# Altium PCB FOC_DRV8323.PcbDoc
Units mil, origin at the board's own origin, x right, y up, seen from the top; angles counter-clockwise.
Board outline 1427.17 x 915.35 mil, 4 copper layers (Top Layer, GND, Sign, Bottom Layer), stack 23.756 mil thick; 70 components, 66 nets, 289 pads, 121 vias.
Unrouted connection lines stored in the file: 51.
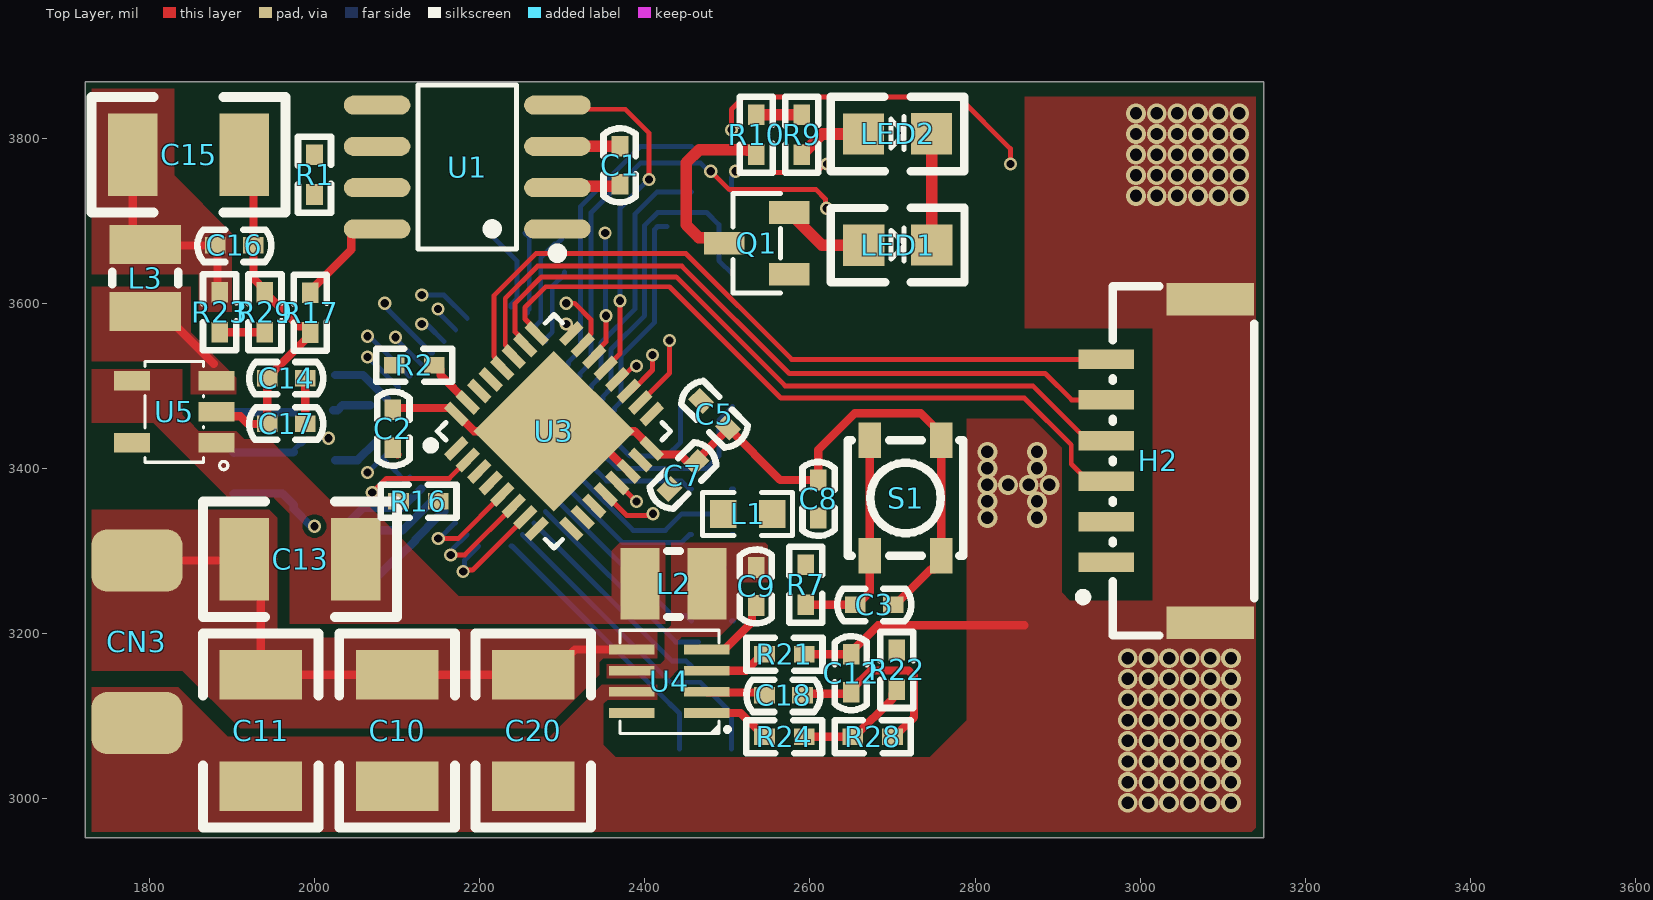
[diagram p0: Top Layer view]
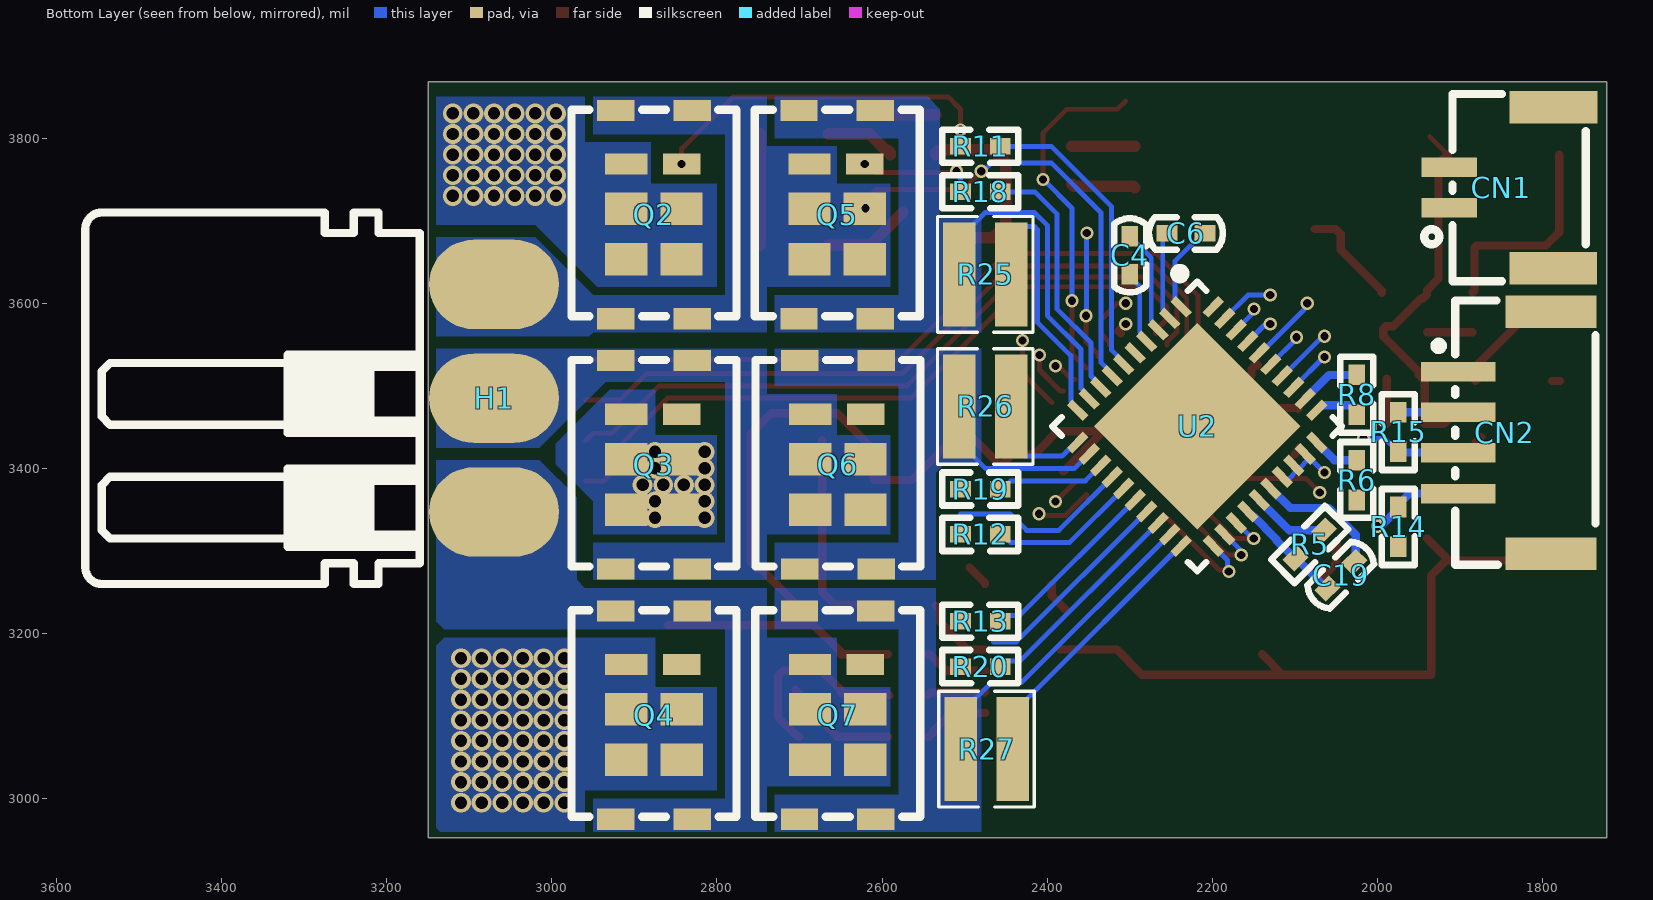
[diagram p1: Bottom Layer view, seen from below]
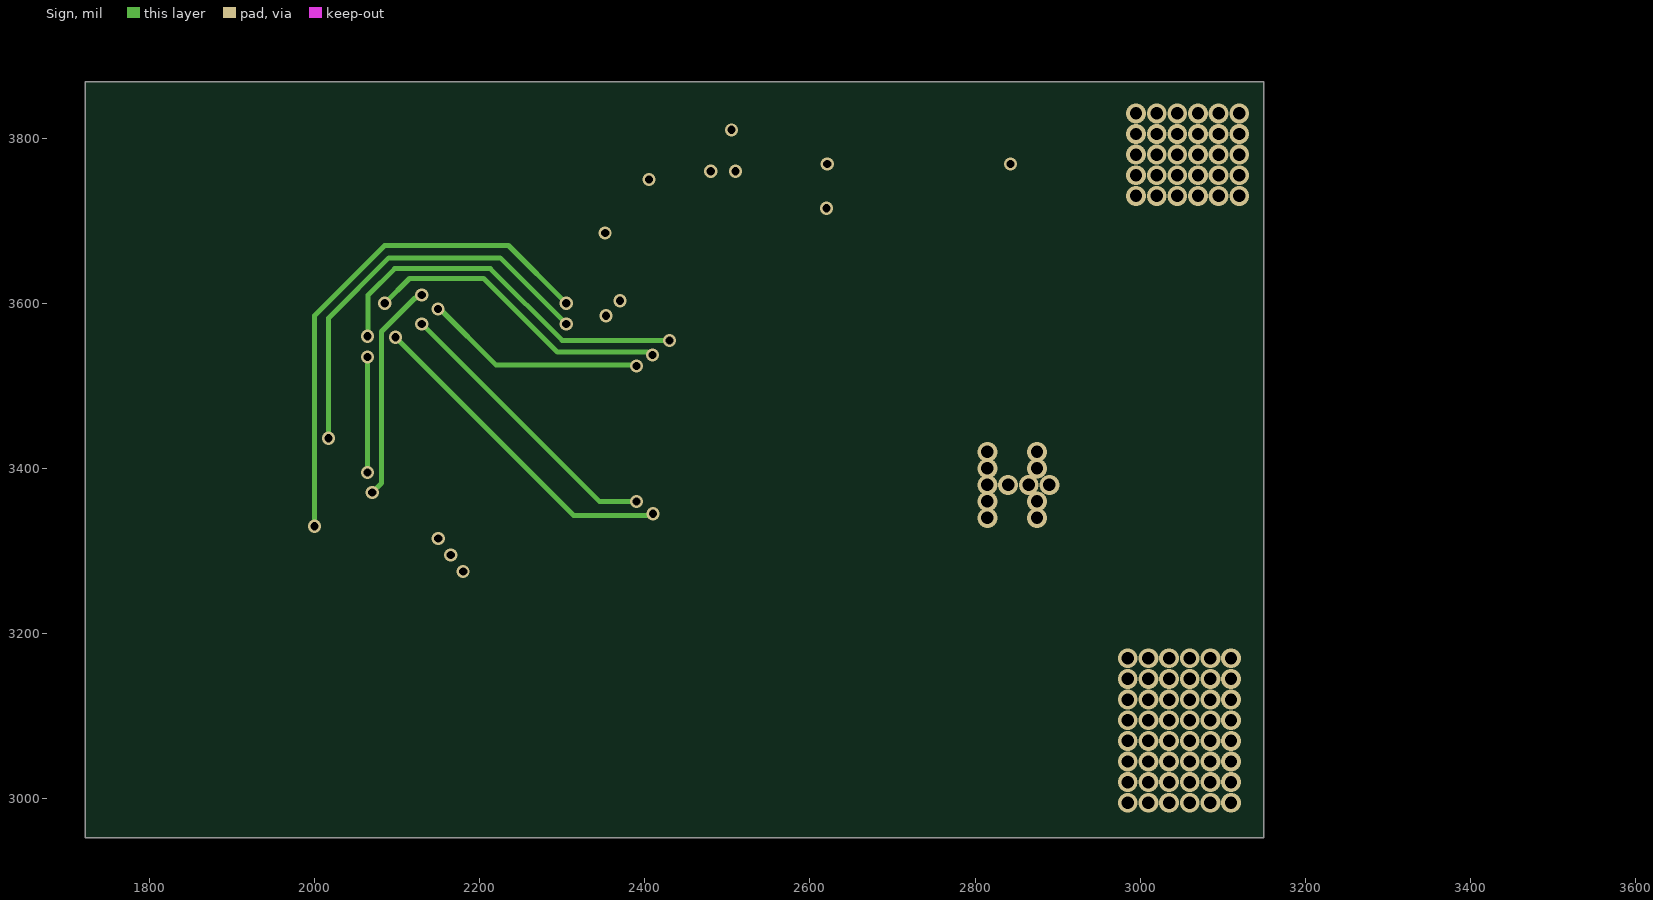
[diagram p2: Sign]
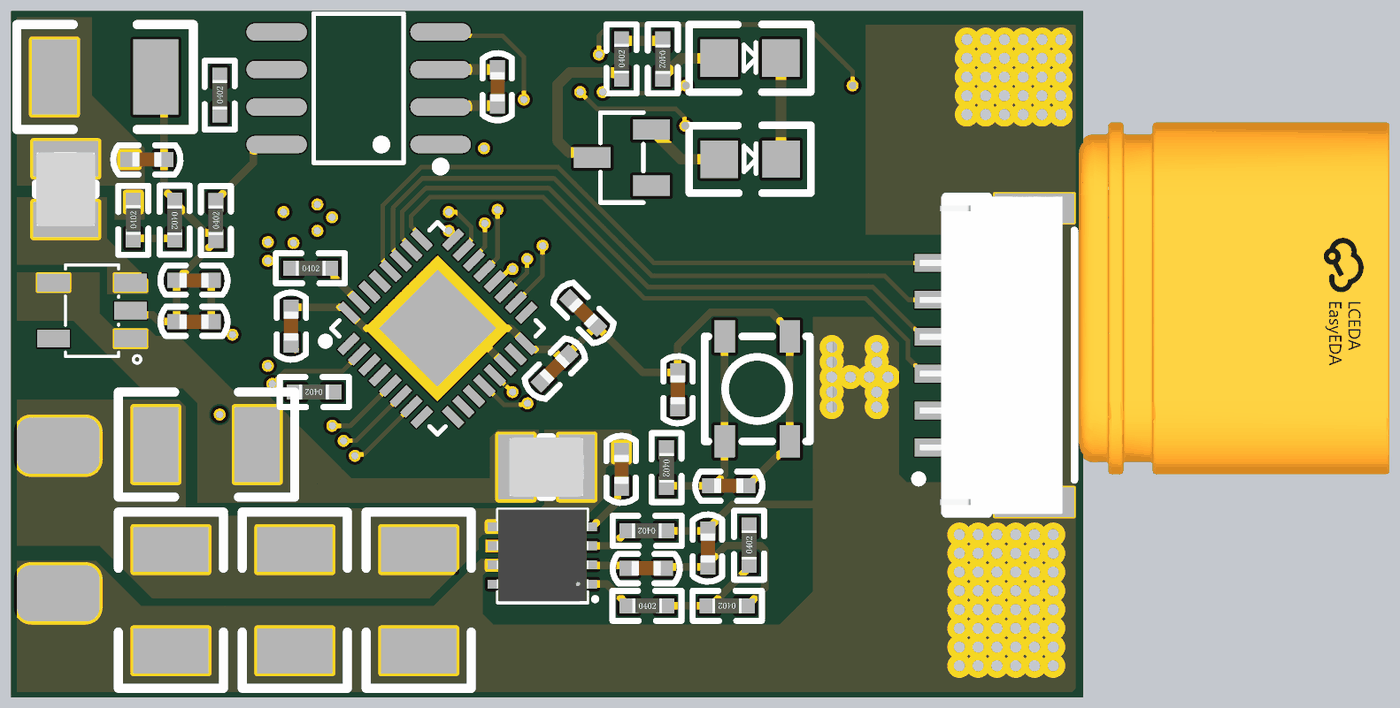
[diagram p3: 3D render of the assembled board from above, using the file's embedded part models]
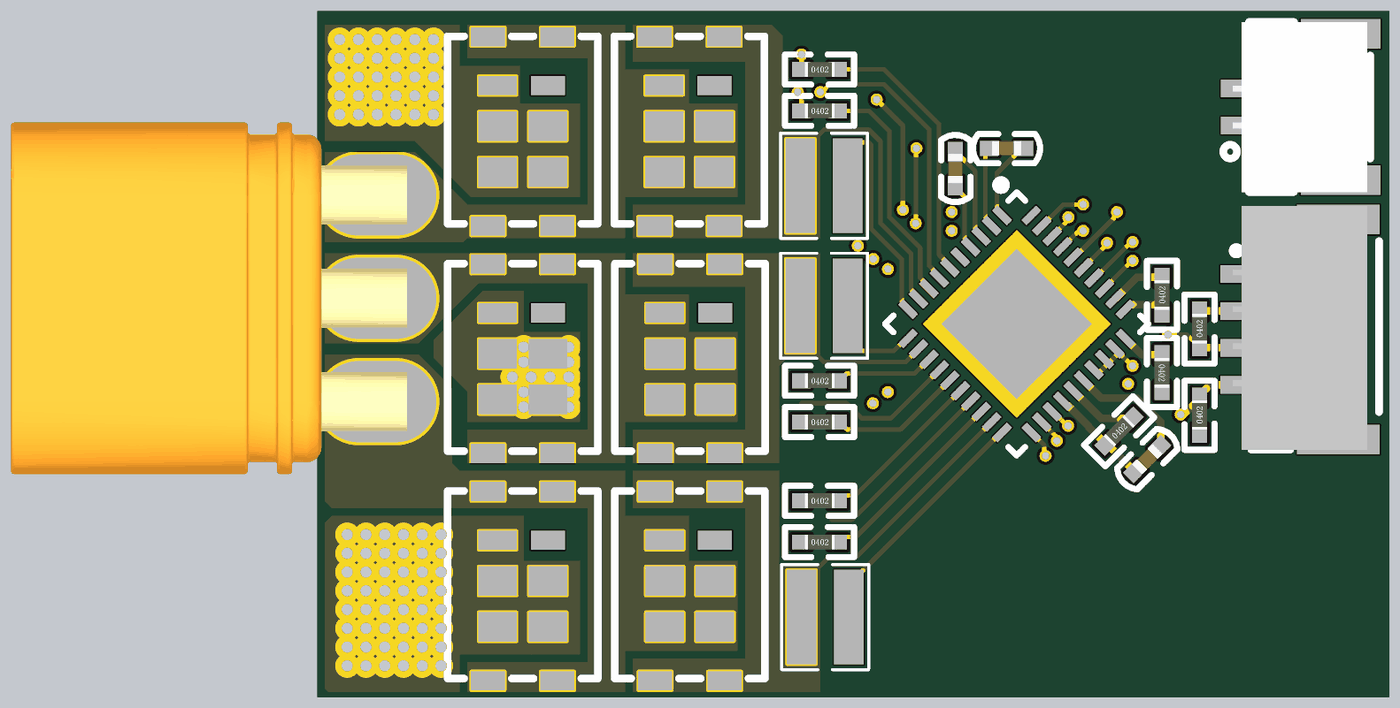
[diagram p4: 3D render of the assembled board from below, using the file's embedded part models]

## Layer stack, top to bottom
Top Solder: solder mask 0.4, Solder Resist, Dk 3.5
Top Layer: signal copper 1.4
Dielectric 2: prepreg 2.8, PP-006, Dk 4.1
GND: signal copper 1.378
Dielectric 1: dielectric 12.6, FR-4, Dk 4.8
Sign: signal copper 1.378
Dielectric 3: prepreg 2.8, PP-006, Dk 4.1
Bottom Layer: signal copper 1.4
Bottom Solder: solder mask 0.4, Solder Resist, Dk 3.5

## Board outline
1722.44,2952.76 1722.44,3868.11 3149.61,3868.11 3149.61,2952.76

## Design rules (kind name [scope] priority, off if disabled: settings)
Clearance [All] p1: gap=6 ignorepadtopadclearanceinfootprint=FALSE except(0: Arc-Hole Track-Hole SMDPad-Hole THPad-Hole Via-Hole Fill-Hole Poly-Hole Region-Hole Text-Hole)
DiffPairsRouting [All] p1: maxlimit=10 minlimit=10 mostfreqgap=10 toplayer_minwidth=15 toplayer_maxwidth=15 toplayer_prefwidth=15 midlayer1_minwidth=15 midlayer1_maxwidth=15 midlayer1_prefwidth=15 midlayer2_minwidth=15 midlayer2_maxwidth=15 midlayer2_prefwidth=15 bottomlayer_minwidth=15 bottomlayer_maxwidth=15 bottomlayer_prefwidth=15 maxuncoupledlength=500
PlaneClearance [All] p1: clearance=8
PlaneConnect [All] p1: planeconnectstyle=Direct reliefexpansion=20 reliefentries=4 reliefconductorwidth=10 reliefairgap=10
PolygonConnect [All] p1: connectstyle=Direct reliefconductorwidth=10 reliefentries=4 polygonreliefangle="90 Angle" airgapwidth=10
RoutingVias [All] p1: holewidth=10 width=16 viastyle="Through Hole" minholewidth=10 minwidth=16 maxholewidth=28 maxwidth=50
SolderMaskExpansion [All] p1: expansion=4 istentingtop=FALSE
Width [All] p1: maxlimit=14 minlimit=6 preferedwidth=10
27 further rules are at their usual default settings.

## Classes and differential pairs
differential pair CAN: +CAN_P -CAN_N

## Components (designator, comment, footprint, x,y, rotation, side; value= is the part's Value field where it differs from the comment)
C1 "100nF" c0402 2370,3745 r90 top
C2 "100nF" c0402 2095,3470 r270 top
C3 "100nF" c0402 2700,3235 r180 top
C4 "1uF" c0402 2300,3680 r270 bottom
C5 "100nF" c0402 2500,3450 r135 top
C6 "47nF" c0402 2210,3685 r0 bottom
C7 "100nF" c0402 2461.82,3406.82 r225 top
C8 "100nF" c0402 2610,3385 r270 top
C9 "100nF" c0402 2535,3235 r90 top
C10 "10uF" 1210 2100,3150 r270 top
C11 "10uF" 1210 1935,3150 r270 top
C12 "100nF" c0402 2650,3130 r90 top
C13 "10uF" 1210 1915,3290 r0 top
C14 "100nF" c0402 1943.82,3508.9 r0 top
C15 "10uF" 1210 1915,3780 r180 top
C16 "100nF" c0402 1925,3670 r180 top
C17 "1uF" c0402 1943.82,3453.9 r0 top
C18 "100nF" c0402 2590,3125 r180 top
C19 "100nF" c0402 2060,3255 r135 bottom
C20 "10uF" 1210 2265,3150 r270 top
CN1 "卧式CAN" "GH1.25 2P 卧式" 1850,3740 r90 bottom
CN2 "卧式STLINK" CONN-SMD_4P-P1.25_GH1.25-4P 1846.1,3443.35 r90 bottom
CN3 "XT30_1" XT30卧式焊盘 1785,3190 r0 top
H1 "MR30-M" MR30 3070,3485 r270 bottom
H2 "卧式GH1.25 6PIN" CONN-SMD_6P-P1.25_XYECONN_XY-GH1.25-6A61 3022.01,3409.13 r90 top
L1 "1008屏蔽电感" R0603 3889.19,3386.01 r180 top
L2 "1008屏蔽电感" IND-SMD_L2.5-W2.0 2435,3260 r0 top
L3 "1008屏蔽电感" IND-SMD_L2.5-W2.0 1795,3630.48 r270 top
LED1 "LED" led0805 2665.2,3670.35 r0 top
LED2 "LED" led0805 2665,3805 r0 top
Q1 "SS8050" SOT-23-3_L2.9-W1.3-P1.90-LS2.4-BR 2316.65,3827.51 r0 top
Q2 "IRF7480MTRPBF" TRS-SMD_IRF7480MTRPBF 2876.3,3707.44 r270 bottom
Q3 "IRF7480MTRPBF" TRS-SMD_IRF7480MTRPBF 2876.3,3404.31 r270 bottom
Q4 "IRF7480MTRPBF" TRS-SMD_IRF7480MTRPBF 2876.26,3101.18 r270 bottom
Q5 "IRF7480MTRPBF" TRS-SMD_IRF7480MTRPBF 2654.36,3707.44 r270 bottom
Q6 "IRF7480MTRPBF" TRS-SMD_IRF7480MTRPBF 2653.47,3404.31 r270 bottom
Q7 "IRF7480MTRPBF" TRS-SMD_IRF7480MTRPBF 2653.74,3101.18 r270 bottom
R1 "120Ω" R0402 2000,3731.8 r90 top
R2 "10K" R0402 2096.8,3525 r0 top
R5 "200k" R0402 2099.08,3290.92 r135 bottom
R6 "200k" R0402 2025,3410 r270 bottom
R7 "10K" R0402 2595,3283.2 r270 top
R8 "200k" R0402 2025,3465 r90 bottom
R9 "2K" R0402 2590,3828.2 r270 top
R10 "2KΩ" R0402 2535,3780 r90 top
R11 "2.2R" R0402 2505,3790 r180 bottom
R12 "2.2R" R0402 2505,3320 r180 bottom
R13 "2.2R" R0402 2505,3215 r180 bottom
R14 "10KΩ" R0402 1975,3305 r90 bottom
R15 "10KΩ" R0402 1975,3420 r90 bottom
R16 "0" R0402 2150,3360 r180 top
R17 "0" R0402 1994.88,3564.59 r90 top
R18 "2.2R" R0402 2505,3735 r180 bottom
R19 "2.2R" R0402 2505,3375 r180 bottom
R20 "2.2R" R0402 2505,3160 r180 bottom
R21 "10KΩ" R0402 2593.2,3175 r180 top
R22 "43KΩ" R0402 2705,3131.8 r90 top
R23 "232KΩ" R0402 1885,3565 r90 top
R24 "51KΩ" R0402 2545,3075 r0 top
R25 "0.001" R0612 2475,3635 r0 bottom
R26 "0.001" R0612 2475,3475 r0 bottom
R27 "0.001" R0612 2473.5,3060 r0 bottom
R28 "8.2KΩ" R0402 2700,3075 r180 top
R29 "51KΩ" R0402 1940,3613.2 r270 top
S1 "SW" KEY_SMD 2715.86,3364.14 r90 top
U1 "SN65HVD1050DR" SOIC-8_L4.9-W3.9-P1.27-LS6.0-BL 2185,3765 r90 top
U2 "DRV8323HRTAR" QFN-40_L6.0-W6.0-P0.50-BL-EP4.5 2226.52,3458.96 r315 bottom
U3 "STM32G431KBU3" UFQFPN-32_L5.0-W5.0-P0.50-BL-EP3.5 2286.98,3441.98 r315 top
U4 "MP9943" "QFN-8 3x3" 2475,3103.82 r180 top
U5 "TLV62569DBVR" SOT-23-5_L3.0-W1.7-P0.95-LS2.8-BR 1830,3465 r0 top

## Footprints (in the part's own frame and the unit in brackets; to place one, negate y for a bottom-side part, rotate by r counter-clockwise, add the part's x,y. Pads: shape width x height; smd on the part's side, far side on the other; paste and mask are expansions set on the pad)
1210 [mil]
  rect 60x100 smd: 1(0,0) 2(135,0)
  silkscreen extent -50,-70 185,70, body extent 4,-49 130,49, height 30
c0402 [mil]
  rect 25x20 smd: 1(-1,0) 2(45,0)
  silkscreen extent -23,-19 67,20, body extent 2,-10 42,10, height 20
CONN-SMD_4P-P1.25_GH1.25-4P [mm]
  rect 0.6x2.3 smd mask+0.051: 1(1.875,1.425) 2(0.625,1.425) 3(-0.625,1.425) 4(-1.875,1.425)
  rect 1x2.8 smd mask+0.051: 5(-3.725,-1.425) 6(3.725,-1.425)
  silkscreen extent -4.06,-2.8 4.06,2.16, body extent -4.07,-2.4 4.19,2.15, height 4.13
CONN-SMD_6P-P1.25_XYECONN_XY-GH1.25-6A61 [mm]
  rect 0.6x1.7 smd paste+0 mask+0.05: 1(-3.125,1.6) 2(-1.875,1.6) 3(-0.625,1.6) 4(0.625,1.6) 5(1.875,1.6) 6(3.125,1.6)
  rect 1x2.7 smd paste+0 mask+0.05: 7(4.975,-1.6) 8(-4.975,-1.6)
  silkscreen extent -5.38,-2.95 5.38,2.44, body extent -5.38,-2.55 5.39,2.3, height 4.34
"GH1.25 2P 卧式" [mm]
  rect 0.6x1.7 smd mask+0.051: 1(-0.625,1.602) 2(0.625,1.602)
  rect 1x2.7 smd mask+0.051: 3(2.475,-1.602) 4(-2.475,-1.598)
  silkscreen extent -2.88,-2.6 2.88,2.37, body extent -2.88,-2.51 2.88,2.05, height 4.13
IND-SMD_L2.5-W2.0 [mm]
  rect 1.2x2.2 smd: 1(1.028,0) 2(-1.028,0)
  silkscreen extent -0.2,-1.02 0.2,1.02, body extent -1.26,-1 1.26,1, height 1.2
KEY_SMD [mm]
  rect 1.1x0.7 smd: 1(-1.775,-1.1) 1(1.775,-1.1) 2(-1.775,1.1) 2(1.775,1.1)
  silkscreen extent -1.78,-1.78 1.78,1.78
led0805 [mil] "1/8W"
  rect 50x50 smd: 1(0,0) 2(82.3,0.2)
  silkscreen extent -40,-45 122,45, body extent 2,-25 80,25, height 20
MR30 [mm]
  oval 2.75x4 smd: 1(3.5,0) 2(0,0) 3(-3.5,0)
  silkscreen extent -5.72,-12.57 5.71,-2.29, body extent -5.95,-12.39 5.95,1.01, height 2.45
"QFN-8 3x3" [mm]
  rect 1.4x0.3 smd: 1(0,0) 2(0,-0.65) 3(0,-1.3) 4(0,-1.95) 5(2.3,-1.95) 6(2.3,-1.3) 7(2.3,-0.65) 8(2.3,0)
  silkscreen extent -0.64,-2.54 2.67,0.64, body extent -0.41,-2.53 2.69,0.57, height 0.94
QFN-40_L6.0-W6.0-P0.50-BL-EP4.5 [mm]
  rect 0.25x0.7 smd paste-100 mask+0.051: 1(-2.25,-2.659) 2(-1.75,-2.659) 3(-1.25,-2.659) 4(-0.75,-2.659) 5(-0.25,-2.659) 6(0.25,-2.659) 7(0.75,-2.659) 8(1.25,-2.659) 9(1.75,-2.659) 10(2.25,-2.659) 21(2.25,3.241) 22(1.75,3.241) 23(1.25,3.241) 24(0.75,3.241) 25(0.25,3.241) 26(-0.25,3.241) 27(-0.75,3.241) 28(-1.25,3.241) 29(-1.75,3.241) 30(-2.25,3.241)
  rect 0.7x0.25 smd paste-100 mask+0.051: 11(2.95,-1.958) 12(2.95,-1.459) 13(2.95,-0.958) 14(2.95,-0.459) 15(2.95,0.042) 16(2.95,0.541) 17(2.95,1.042) 18(2.95,1.541) 19(2.95,2.041) 20(2.95,2.541) 31(-2.95,2.541) 32(-2.95,2.041) 33(-2.95,1.541) 34(-2.95,1.042) 35(-2.95,0.541) 36(-2.95,0.042) 37(-2.95,-0.459) 38(-2.95,-0.958) 39(-2.95,-1.459) 40(-2.95,-1.958)
  rect 4.5x4.5 smd paste-100 mask+0.051: 41(0,0.292)
  silkscreen extent -3.15,-3.56 3.15,3.44
R0402 [mil] "1/16W"
  rect 25x20 smd: 1(0,0) 2(48.2,0)
  silkscreen extent -22,-20 70,20, body extent 5,-10 44,10, height 14
R0603 [mil]
  rect 31.75x34.02 smd paste-3937.01 mask+2: 1(1334.87,41.01) 2(1394.19,41.01)
  silkscreen extent 1310,15 1419,67, body extent 1334,24 1396,56, height 18
R0612 [mm]
  rect 1x3.2 smd paste+0 mask+0.051: 1(-0.8,0) 2(0.8,0)
  silkscreen extent -1.47,-1.78 1.47,1.78
SOIC-8_L4.9-W3.9-P1.27-LS6.0-BL [mm]
  oval 0.588x2.045 smd mask+0.051: 1(-1.905,-2.772) 2(-0.635,-2.772) 3(0.635,-2.772) 4(1.905,-2.772) 5(1.905,2.772) 6(0.635,2.772) 7(-0.635,2.772) 8(-1.905,2.772)
  silkscreen extent -2.8,-2.92 2.53,1.52, body extent -2.45,-3 2.45,3, height 1.75
SOT-23-3_L2.9-W1.3-P1.90-LS2.4-BR [mm]
  rect 1.25x0.7 smd: 1(6.562,-4.885) 2(6.562,-2.985) 3(4.562,-3.935)
  silkscreen extent 4.84,-5.46 6.29,-2.41, body extent 4.19,-5.39 6.99,-2.49, height 1.3
SOT-23-5_L3.0-W1.7-P0.95-LS2.8-BR [mm]
  rect 1.1x0.6 smd paste+0 mask+0.051: 1(1.3,-0.861) 2(1.3,0.089) 3(1.3,1.039) 4(-1.3,1.039) 5(-1.3,-0.861)
  silkscreen extent -0.9,-1.69 1.65,1.64
TRS-SMD_IRF7480MTRPBF [mm]
  rect 0.65x1.15 smd paste+0 mask+0.051: 1(-1.555,0.85) 7(-3.205,1.175) 8(-3.205,-1.175) 9(3.205,-1.175) 10(3.205,1.175)
  rect 1x1.3 smd paste+0 mask+0.051: 2(-0.175,0.85) 3(1.375,0.85) 4(1.375,-0.85) 5(-0.175,-0.85)
  rect 0.65x1.3 smd paste+0 mask+0.051: 6(-1.555,-0.85)
  silkscreen extent -3.22,-2.54 3.13,2.54
UFQFPN-32_L5.0-W5.0-P0.50-BL-EP3.5 [mm]
  rect 0.28x0.8 smd paste-100 mask+0.051: 1(-1.75,-2.392) 2(-1.25,-2.392) 3(-0.75,-2.392) 4(-0.25,-2.392) 5(0.25,-2.392) 6(0.75,-2.392) 7(1.25,-2.392) 8(1.75,-2.392) 17(1.75,2.609) 18(1.25,2.608) 19(0.75,2.609) 20(0.25,2.608) 21(-0.25,2.608) 22(-0.75,2.608) 23(-1.25,2.608) 24(-1.75,2.608)
  rect 0.8x0.28 smd paste-100 mask+0.051: 9(2.5,-1.642) 10(2.5,-1.142) 11(2.5,-0.642) 12(2.5,-0.142) 13(2.5,0.358) 14(2.5,0.858) 15(2.5,1.358) 16(2.5,1.858) 25(-2.5,1.858) 26(-2.5,1.358) 27(-2.5,0.858) 28(-2.5,0.358) 29(-2.5,-0.142) 30(-2.5,-0.642) 31(-2.5,-1.142) 32(-2.5,-1.642)
  rect 3.5x3.5 smd paste-100 mask+0.051: 33(0,0.108)
  silkscreen extent -2.54,-3.01 2.54,2.65
XT30卧式焊盘 [mil]
  rrect50% 110x75 smd: 1(0,98.43) 2(0,-98.43)

## Part data
C1 C9 C12 C14 C15 C16 C17 C18: library part 0402贴片电容, "贴片电容0402"
C2 C3 C4 C5 C6 C7 C8 C19: library part CC0201JRX7R9BB101
C10 C11 C13 C20: library part 1210贴片电容, "1210贴片电容"
H1: BOM_Manufacturer=AMASS(艾迈斯), BOM_Manufacturer Part=MR30-M, BOM_Supplier=LCSC, BOM_Supplier Part=C99873, Contributor=LCEDA_Lib, spicePre=H, spiceSymbolName=HDR-F-2.54_1x3
LED1 LED2: library part 0805贴片LED, "0805贴片LED"
Q1: library part 2N2222, "三极管"
R1 R10 R14 R15 R21 R22 R23 R24 R28 R29: library part 0402贴片电阻, "0402贴片电阻"
R2 R5 R6 R7 R8 R9 R16 R17: library part 2.2R, BOM_Manufacturer=UniOhm, BOM_Manufacturer Part=0603WAJ022JT5E, BOM_Supplier=LCSC, BOM_Supplier Part=C25226, nameAlias=Value(Ω), spicePre=R, spiceSymbolName=Res_0603(1/10W)_EU
R11 R12 R13 R18 R19 R20: BOM_Manufacturer=UniOhm, BOM_Manufacturer Part=0603WAJ022JT5E, BOM_Supplier=LCSC, BOM_Supplier Part=C25226, nameAlias=Value(Ω), spicePre=R, spiceSymbolName=Res_0603(1/10W)_EU
R25 R26 R27: library part 0.0005, BOM_Manufacturer=RALEC(旺诠), BOM_Manufacturer Part=LR2512-23R0005J4, BOM_Supplier=LCSC, BOM_Supplier Part=C2681067, Contributor=LCSC, nameAlias="Resistance (Ohms)", spicePre=R, spiceSymbolName=LCSR2512FL500K9L
S1: "开关"
U1: "CAN芯片", JLCPCB Part Class="Extended Part", LCSC Part Name=4.5V~5.5V, Manufacturer=TI(德州仪器), Operating Temperature=-40℃~+125℃, Supply Current=50mA, Add into BOM=yes, Convert to PCB=yes, Datasheet=https://www.ti.com/cn/lit/gpn/sn65hvd1050, Device=SN65HVD1050DR, Manufacturer Part=SN65HVD1050DR, Name=SN65HVD1050DR, Supplier=LCSC, Supplier Footprint=SOIC-8, Supplier Part=C14019, Supply Voltage=4.5V~5.5V, Symbol=SN65HVD1050DR, Type=收发器
CN1: LatestRevisionDate=17-Jul-2002, LatestRevisionNote="Re-released for DXP Platform.", Publisher="Altium Limited"

## Via types
v1: diameter 24, hole 15, Top Layer to Bottom Layer, 90 vias
v2: diameter 16, hole 10, Top Layer to Bottom Layer, 31 vias

## Nets (pads, with @x,y where several pads share a name; then routed paths per layer and width w, separated by ;. In a path a pad name is that pad's centre, name@x,y a point inside that pad or via, vN(x,y) a via of type N, cw(c..) or ccw(c..) an arc to the next point about the centre after c; other vN are vias at no path point)
5V: C1.2 C13.2 C14.2 C17.2 H2.1 L2.2 R22.2 U1.3 U5.1 U5.4 | length 237
  Top Layer w10: U5.4 U5.4@1788.66,3505.91 ; U5.1@1874.37,3437.91 U5.1 ; C17.2 C14.2 ; C13.2@2050,3310 C13.2 2050,3285 C13.2@2065,3270 ; L2.2@2375.9,3227.24 2394.52,3245.86 L2.2
  Top Layer w14: U1.3 C1.2
+3.3V: C2.2 C5.2 C8.2 C15.2 C16.2 C19.1 CN2.1 L1.1 L3.2 R5.1 R7.1 R9.1 R10.2 R14.1 R23.2 U2.24 U3.1 U3.17 | length 471
  Top Layer w10: C15.2 1780,3685.96 L3.2 1795.96,3670 C16.2 1882.5,3667.5 1882.5,3615.7 R23.2 ; C2.2 2095,3422.5 C2.2@2100.62,3416.88 ; U3.1@2164.44,3416.88 U3.1
  Top Layer w14: R10.2 R9.1
  Bottom Layer w10: C19.1 2061.58,3254.29 2098.21,3290.92 2100.13,3290.92 2122.64,3313.42 2122.64,3314.51 2149.82,3341.69 2151.01,3341.69 U2.24
AGND: C19.2 R8.2 R16.1 U2.26 U2.32 | length 234.2
  Bottom Layer w10: R8.2 2058.61,3513.2 U2.32 ; C19.2 2026.41,3288.59 2026.41,3319.65 2058.68,3351.91 2105.55,3351.91 U2.26
CAL: R8.1 U2.31 U3.9 | length 47.1
  Bottom Layer w10: R8.1@2022.83,3470.33 2027.83,3470.33 2033.99,3476.49 U2.31@2067.38,3476.49
CAN_N: CN1.2 R1.2 U1.6
CAN_P: CN1.1 R1.1 U1.7
DGND: C1.1 C2.1 C3.1 C5.1 C7.1 C8.1 CN2.2 H2.2 LED1.2 LED2.2 R2.1 R15.2 R17.2 S1.1 U1.2 U1.8 U3.14 U3.16 U3.32 U3.33 | length 1517.3
  Top Layer w10: R17.2 1994.88,3615.29 2044.65,3665.06 2044.65,3683.93 2050.73,3690 U1.8 ; C2.1@2095.9,3471.9 2097.12,3473.12 2164.44,3473.12 U3.32 2172.41,3465.88 2193.29,3445 U3.33 U3.33@2331.75,3445 ; U3.14 U3.33@2331.75,3445 ; C3.1 2703.5,3235 2746.11,3277.61 2750.38,3277.61 2759.16,3286.38 2759.16,3294.26 2759.16,3434.02 2759.16,3441.9 2734.38,3466.68 2654.21,3466.68 2610,3422.46 C8.1 2564,3386 C5.1 2500.71,3447.5 2462.53,3409.32 C7.1 2460.76,3405.76 2453.69,3405.76 2442.57,3416.88 2415.55,3416.88 U3.16 2387.43,3445 U3.33@2331.75,3445
  Top Layer w14: U1.2 2295.9,3741.75 2367.75,3741.75 C1.1 ; LED1.2 LED2.2@2747.5,3805
  Bottom Layer w10: CN2.2 1902.32,3468.08 1974.88,3468.08 R15.2
DVDD: U2.27 U2.28 U2.29 U2.33 | length 274.9
  Sign w6: v2(2064.17,3395) v2(2064.17,3535)
  Bottom Layer w6: v2(2064.17,3395) 2064.64,3395 2080.52,3410.88 2083.72,3410.88 2094.92,3399.67 U2.28@2097.64,3399.67 ; v2(2064.17,3535) 2064.83,3535 2101.48,3498.34 U2.33 ; U2.29@2083.72,3413.59 U2.29 ; U2.28 U2.28@2097.64,3399.67 ; U2.27 2111.56,3385.76 2108.84,3385.76 2097.64,3396.96 U2.28@2097.64,3399.67
FDCAN_RX: U1.4 U3.21 | length 422.5
  Top Layer w6: U1.4@2305,3845 2315,3835 2376.42,3835 2405,3806.42 v2(2405,3750) ; U3.21 2370,3538.93 v2(2370,3603)
  Bottom Layer w6: v2(2370,3603) 2370,3715 v2(2405,3750)
FDCAN_TX: U1.1 U3.22 | length 155.9
  Top Layer w6: U3.22 2338.71,3539.03 2353,3553.31 v2(2353,3585)
  Bottom Layer w6: v2(2352,3685) 2352.5,3684.5 2352.5,3585.5 v2(2353,3585)
M0_AH: U2.34 U3.18 | length 625.7
  Top Layer w6: U3.18 2430,3515.41 v2(2430,3555)
  Sign w6: v2(2064.17,3560) 2065,3560.83 2065,3610 2097,3642 2213,3642 2300,3555 v2(2430,3555)
  Bottom Layer w6: v2(2064.17,3560) 2066.24,3560 2114.16,3512.09 U2.34
M0_AL: U2.35 U3.12 | length 519.9
  Top Layer w6: U3.12@2352.64,3364.88 U3.12 2378.07,3343 2405.29,3343 2407.29,3345 v2(2410,3345)
  Sign w6: v2(2098.17,3558.75) 2110.77,3546.15 2313.92,3343 2397.04,3343 2397.13,3343.09 2408.09,3343.09 v2(2410,3345)
  Bottom Layer w6: v2(2098.17,3558.75) 2098.17,3557.17 U2.35
M0_BH: U2.36 U3.19 | length 518.5
  Top Layer w6: U3.19 2384.03,3493.73 2409.45,3519.15 v2(2409.45,3537.36)
  Sign w6: v2(2085,3600) 2115,3630 2205,3630 2294.04,3540.96 2403.15,3540.96 2406.74,3537.36 v2(2409.45,3537.36)
  Bottom Layer w6: v2(2085,3600) 2085,3597.29 2089,3593.29 2089,3591.96 2141.03,3539.93 U2.36
M0_BL: U2.37 U3.13 | length 417.7
  Top Layer w6: U3.13 2367.1,3382.35 2389.45,3360 v2(2390,3360)
  Sign w6: v2(2130,3575) 2345,3360 v2(2390,3360)
  Bottom Layer w6: v2(2130,3575) 2131.91,3573.09 2137.42,3573.09 2156.66,3553.85 U2.37
M0_CH: U2.38 U3.20 | length 333.3
  Top Layer w6: U3.20 2369.92,3507.64 2384.33,3522.04 2388.09,3522.04 v2(2390,3523.96)
  Sign w6: v2(2149.65,3593) 2152,3593 2220,3525 2388.96,3525 v2(2390,3523.96)
  Bottom Layer w6: v2(2149.65,3593) 2151.56,3591.09 2151.56,3587.28 U2.38
M0_CL: U2.39 U3.2 | length 468.8
  Top Layer w6: v2(2070,3370.91) 2086.98,3387.89 2163.3,3387.89 U3.2 U3.2@2182.05,3410.2
  Sign w6: v2@2070,3370.95 2081.17,3382.12 2081.17,3565.79 2121.67,3606.29 2123.58,3606.29 2127.29,3610 v2(2130,3610)
  Bottom Layer w6: v2(2130,3610) 2156.69,3610 U2.39
M0_GH_A: R11.2 U2.6 | length 362
  Bottom Layer w6: U2.6 2307.49,3528.73 2322,3543.24 2322,3717 2395,3790 R11.2
M0_GH_B: R12.2 U2.15 | length 180.7
  Bottom Layer w6: U2.15 2373.17,3310 2444.3,3310 2454.3,3320 R12.2
M0_GH_C: R13.2 U2.16 | length 224
  Bottom Layer w6: U2.16 2433.33,3222 2449.8,3222 R13.2
M0_GL_A: R18.2 U2.8 | length 311.6
  Bottom Layer w6: U2.8 2335.33,3500.24 2347,3511.91 2347,3552 2387.94,3592.94 2387.94,3707.94 2415,3735 R18.2
M0_GL_B: R19.2 U2.13 | length 133.3
  Bottom Layer w6: U2.13 2353.84,3385 2444.3,3385 2454.3,3375 R19.2
M0_GL_C: R20.2 U2.18 | length 263.1
  Bottom Layer w6: U2.18 2432.66,3167 2449.8,3167 R20.2
M0_SH_A: H1.3 Q2.7 Q2.8 Q2.9 Q2.10 Q5.2 Q5.3 Q5.4 Q5.5 Q5.6 U2.7 | length 542
  Top Layer w6: v2(2480,3760) 2502.49,3737.51 2607.49,3737.51 2618.98,3726.02 2618.98,3716.02 v2(2620,3715)
  Bottom Layer w6: U2.7 2321.41,3514.81 2335,3528.39 2335,3710 2395,3770 2467.29,3770 2477.29,3760 v2(2480,3760)
M0_SH_B: H1.2 Q3.7 Q3.8 Q3.9 Q3.10 Q6.2 Q6.3 Q6.4 Q6.5 Q6.6 U2.14 | length 218.8
  Bottom Layer w6: U2.14 2386.01,3325 2425,3325 2445,3345 2505.21,3345
M0_SH_C: H1.1 Q4.7 Q4.8 Q4.9 Q4.10 Q7.2 Q7.3 Q7.4 Q7.5 Q7.6 U2.17 | length 250.7
  Bottom Layer w6: U2.17 2437.49,3190 2465,3190
M0_SNA: C10.1 C11.1 C12.1 C13.1 C14.1 C15.1 C16.1 C17.1 C18.1 C20.1 CN3.1 R16.2 R17.1 R25.1 R26.1 R27.1 R28.1 R29.1 U2.10 U2.11 U2.20 U2.40 U2.41 U4.5 U5.2 | length 2274.2
  Top Layer w6: C15.1 C15.1@1936.72,3801.72
  Top Layer w10: CN3.1 1913.42,3288.43 C13.1 ; U5.2 1886.58,3463.1 1910.46,3463.1 1919.67,3453.9 C17.1 C14.1 1945.32,3508.9 1950.32,3513.9 1950.32,3517.26 1989.88,3556.82 1989.88,3557.09 1992.86,3560.07 1993.13,3560.07 1993.13,3568.84 1989.88,3572.09 1981.11,3572.09 1947.5,3605.7 1945,3605.7 R29.1@1940,3610.7 ; C15.1 1926,3769 C16.1 1926,3629.7 1940,3615.7 R29.1@1940,3610.7 ; C13.1@1940,3315 C13.1 ; R29.1 R29.1@1940,3610.7 ; C10.1@2140,3175 C10.1@2115,3150 ; U4.5 2315.59,3180.59 2285,3150 C20.1 C10.1@2115,3150 ; C18.1 2593,3127 2648,3127 C12.1 2650,3131.5 2673.8,3155.3 2719.7,3155.3 2726,3149 2726,3098.5 2702.5,3075 R28.1 ; C13.1 1935,3270 C11.1 C10.1 C10.1@2115,3150
  Bottom Layer w6: U2.20 2239.23,3306.08 R27.1@2425.32,3119.99 ; U2.11 2365.55,3431.36 2381.9,3415 2423.3,3415 2426.82,3415.01 2443.5,3431.69 R26.1 ; U2.10 2363.17,3473.05 2371.47,3481.36 2371.47,3536.47 2411.94,3576.94 2411.94,3689.39 2415.46,3692.91 R25.1@2426.82,3692.91 ; R27.1@2433.67,3111.65 R27.1@2425.32,3119.99 ; R27.1 2442.01,3103.31 R27.1@2425.32,3119.99
M0_SOA: U2.23 U3.5 | length 128.4
  Top Layer w6: v2(2150,3315) 2173.92,3315 U3.5
  Bottom Layer w6: v2(2150,3315) 2151.08,3315 2170,3333.92 U2.23
M0_SOB: U2.22 U3.6 | length 134.2
  Top Layer w6: v2(2165,3295) 2165.24,3295.24 2182,3295.24 U3.6
  Bottom Layer w6: v2(2165,3295) 2166.91,3296.91 2166.91,3301.91 U2.22
M0_SOC: U2.21 U3.7 | length 141.3
  Top Layer w6: v2(2180,3275) 2181.91,3276.91 2191.51,3276.91 U3.7
  Bottom Layer w6: v2(2180,3275) 2181.91,3276.91 2181.91,3289.08 U2.21
M0_SPA: Q5.7 Q5.8 Q5.9 Q5.10 R25.2 U2.9 | length 400.7
  Bottom Layer w6: U2.9 2349.25,3486.97 2359,3496.72 2359,3544 2399.94,3584.94 2399.94,3694.36 2415.58,3710 2475,3710 2489.81,3695.19 2489.81,3651.68 R25.2
M0_SPB: Q6.7 Q6.8 Q6.9 Q6.10 R26.2 U2.12 | length 221
  Bottom Layer w6: U2.12 2366.69,3400 2475,3400 2489.81,3414.81 2489.81,3458.32 R26.2
M0_SPC: Q7.7 Q7.8 Q7.9 Q7.10 R27.2 U2.19 | length 386.3
  Bottom Layer w6: U2.19 2430.81,3141 2467.31,3141 2505,3103.31 R27.2
NetC3_2: C3.2 R7.2 S1.2 U3.4 | length 267.8
  Top Layer w10: R7.2 2657.5,3235 2672.55,3250.05 S1.2@2672.55,3434.02
NetC4_1: C4.1 U2.3 | length 128.9
  Bottom Layer w6: U2.3 2265.73,3570.48 2274.03,3578.78 2274.03,3655.03 2290.5,3671.5 2293,3671.5 2300,3678.5 C4.1
NetC4_2: C4.2 U2.4 | length 93.4
  Bottom Layer w6: U2.4 2279.65,3556.57 2287.96,3564.88 2287.96,3620.46 2302.7,3635.2 C4.2@2302.7,3637.7
NetC6_1: C6.1 U2.1 | length 108.7
  Bottom Layer w6: C6.1 2211.5,3685 2218.5,3678 2245,3651.5 2245,3605.44 2237.89,3598.33 U2.1
NetC6_2: C6.2 U2.2 | length 100
  Bottom Layer w6: C6.2 2260.11,3679.89 2260.11,3592.71 2258.07,3590.67 U2.2@2258.07,3587.95
NetC7_2: C7.2 L1.2 U3.15
NetC9_1: C9.1 U4.4 | length 90.9
  Top Layer w10: U4.4 2496.65,3180.59 2530,3213.94 2530,3229 C9.1
NetC9_2: C9.2 L2.1 U4.6 | length 27.7
  Top Layer w10: L2.1 2475.48,3261.38 L2.1@2494.1,3280
NetC18_2: C18.2 U4.2 | length 71.8
  Top Layer w10: U4.2 2475.91,3128.5 2541.5,3128.5 C18.2
NetL3_1: L3.1 U5.3 | length 113.7
  Top Layer w10: L3.1 1814.68,3590 1877.83,3526.86 ; U5.3@1877.83,3509.26 U5.3
NetLED1_1: LED1.1 Q1.2 | length 106.6
  Top Layer w14: Q1.2 2614.65,3670.35 LED1.1
NetLED2_1: LED2.1 R9.2 | length 86.8
  Top Layer w14: R9.2 2590,3782.5 2593,3785.5 2595.5,3785.5 2615,3805 LED2.1
NetQ1_3: Q1.3 R10.1 | length 226.1
  Top Layer w14: Q1.3 2489.48,3679.38 2465.62,3679.38 2450,3695 2450,3770 2466,3786 2523.8,3786 2524.3,3785.5 2532,3785.5 2535,3782.5 R10.1
NetQ2_1: Q2.1 R11.1 | length 433.6
  Top Layer w6: v2(2505,3810) 2505,3835 2520,3850 2780,3850 2842.83,3787.17 v2(2842.83,3768.66)
  Bottom Layer w6: R11.1 v2(2505,3810)
NetQ3_1: Q3.1 R12.1 | length 2.5
  Bottom Layer w6: R12.1 R12.1@2507.5,3320
NetQ4_1: Q4.1 R13.1 | length 2.5
  Bottom Layer w6: R13.1 R13.1@2507.5,3215
NetQ5_1: Q5.1 R18.1 | length 142.8
  Top Layer w6: v2(2510,3760) 2511.5,3758.5 2608.03,3758.5 2618.19,3768.66 v2(2620.89,3768.66)
  Bottom Layer w6: R18.1 2505,3752.29 2510,3757.29 v2(2510,3760)
NetQ6_1: Q6.1 R19.1 | length 2.5
  Bottom Layer w6: R19.1 R19.1@2507.5,3375
NetQ7_1: Q7.1 R20.1
NetR2_2: R2.2 U3.31 | length 63.5
  Top Layer w10: R2.2 2147.5,3525 2152.5,3520 2152.5,3512.9 U3.31
NetR6_1: R6.1 U2.30 | length 57.5
  Bottom Layer w10: R6.1 2052.29,3410 U2.30
NetR21_2: R21.2 U4.3 | length 78.3
  Top Layer w10: U4.3 2522.5,3155 2542.5,3175 R21.2
NetR22_1: R22.1 R24.2 R28.2 | length 138.9
  Top Layer w10: R24.2 R28.2 2654.3,3075 2700,3120.7 2700,3126.8 R22.1
NetR23_1: R23.1 R29.2 U5.5 | length 55
  Top Layer w10: R23.1 R29.2
NetR24_1: R24.1 U4.1 | length 83.4
  Top Layer w10: U4.1 2516.18,3103.82 2537.5,3082.5 2537.5,3080 2542.5,3075 R24.1
nFAULT: R5.2 U2.25 U3.11 | length 94.9
  Bottom Layer w10: R5.2 2066.77,3323.23 2073.84,3323.23 2075.61,3325 2106.48,3325 U2.25
SPI_MISO: H2.5 U3.27 | length 886.1
  Top Layer w6: U3.27 2241.28,3539.03 2231,3549.31 2231,3606 2270,3645 2445,3645 2575,3515 2885,3515 2917.05,3482.95 H2.5
SPI_MOSI: H2.6 U3.28 | length 907.6
  Top Layer w6: U3.28 2227.36,3525.11 2217.25,3535.23 2217.25,3609.22 2268.03,3660 2450,3660 2577.84,3532.16 H2.6
SPI_NSS: H2.3 U3.25 | length 863
  Top Layer w6: U3.25 2269.12,3566.87 2255,3580.99 2255,3595.03 2279.97,3620 2430,3620 2565,3485 2860,3485 2916.51,3428.49 2916.51,3405.36 2925.07,3396.81 2937.36,3384.52 H2.3
SPI_SCK: H2.4 U3.26 | length 867
  Top Layer w6: U3.26 2255.2,3552.95 2243,3565.15 2243,3600 2275,3632 2438,3632 2570,3500 2870,3500 2927.45,3442.55 2950.2,3442.55 H2.4
State_LED: Q1.1 U3.10
SWCLK: CN2.3 R15.1 U3.24 | length 636.7
  Top Layer w10: v2(2305,3575) 2313.42,3566.58 2313.42,3565.86 U3.24
  Sign w6: v2(2017,3436.5) 2017,3582 2090,3655 2224.96,3655 v2(2305,3575)
  Bottom Layer w6: R15.1 1975,3422.5 1982,3429.5 1984.5,3429.5 1991.5,3436.5 v2(2017,3436.5)
  Bottom Layer w10: CN2.3 1902.83,3419.37 1974.37,3419.37 R15.1
SWDIO: CN2.4 R14.2 U3.23 | length 814.3
  Top Layer w6: v2(2305,3600) 2315,3600 2334.91,3580.09 2334.91,3563.07 2324.79,3552.95 U3.23
  Sign w6: v2(2000,3330) 2000,3585 2085,3670 2235,3670 v2(2305,3600)
  Bottom Layer w10: CN2.4 1961.17,3369.53 1975,3355.7 R14.2 1975,3350.7 1994.55,3331.15 1998.85,3331.15 v2(2000,3330)
VCC: C10.2 C11.2 C12.2 C20.2 CN3.2 H2.7 H2.8 Q2.2 Q2.3 Q2.4 Q2.5 Q2.6 Q3.2 Q3.3 Q3.4 Q3.5 Q3.6 Q4.2 Q4.3 Q4.4 Q4.5 Q4.6 R6.2 R21.1 U2.5 U4.7 | length 282.8
  Top Layer w10: R21.1 C12.2 2650,3177.5 2682.5,3210 2860,3210
  other v1: 2985,2995 3010,2995 3035,2995 3060,2995 3085,2995 3110,2995 2985,3020 3010,3020 3035,3020 3060,3020 3085,3020 3110,3020 2985,3045 3010,3045 3035,3045 3060,3045 3085,3045 3110,3045 2985,3070 3010,3070 3035,3070 3060,3070 3085,3070 3110,3070 2985,3095 3010,3095 3035,3095 3060,3095 3085,3095 3110,3095 2985,3120 3010,3120 3035,3120 3060,3120 3085,3120 3110,3120 2985,3145 3010,3145 3035,3145 3060,3145 3085,3145 3110,3145 2985,3170 3010,3170 3035,3170 3060,3170 3085,3170 3110,3170 2815,3340 2875,3340 2815,3360 2875,3360 2815,3380 2840,3380 2865,3380 2890,3380 2815,3400 2875,3400 2815,3420 2875,3420 2995,3730 3020,3730 3045,3730 3070,3730 3095,3730 3120,3730 2995,3755 3020,3755 3045,3755 3070,3755 3095,3755 3120,3755 2995,3780 3020,3780 3045,3780 3070,3780 3095,3780 3120,3780 2995,3805 3020,3805 3045,3805 3070,3805 3095,3805 3120,3805 2995,3830 3020,3830 3045,3830 3070,3830 3095,3830 3120,3830
pads on no net: CN1.3 CN1.4 CN2.5 CN2.6 U1.5 U3.3 U3.8 U3.29 U3.30 U4.8

## Polygon pours and split planes (outlines as drawn)
5V on Top Layer "5V_L01_P003" (solid, pour order 3): 1730,3520 1730,3455 1805,3455 1895,3365 1950,3365 1970,3345 1970,3212 2105,3212 2258,3212 2425,3212 2425,3310 2370,3310 2360,3300 2360,3245 2270,3245 2175,3245 2060,3360 2020,3360 1945,3435 1915,3435 1905,3445 1860,3445 1840,3465 1840,3520
VCC on Top Layer (solid, pour order 21): 3135,2960 3140,2965 3140,3850 2860,3850 2860,3570 3015,3570 3015,3240 2915,3240 2905,3250 2905,3425 2870,3460 2790,3460 2790,3095 2745,3050 2365,3050 2350,3065 2350,3115 2355,3120 2415,3120 2415,3138 2348,3138 2285,3075 1895,3075 1835,3135 1730,3135 1730,2960
NetC9_2 on Top Layer "NETC9_2_L01_P023" (solid, pour order 23): 2354,3146 2430,3146 2440,3156 2440,3191 2445,3196 2490,3196 2514,3220 2514,3258 2518,3262 2549,3262 2549,3307 2546,3310 2432,3310 2432,3217 2432,3210 2424,3202 2424,3168 2419,3163 2354,3163
+3.3V on Top Layer "+3.3V_L01_P005" (solid, pour order 5): 1860,3590 1900,3590 1900,3685 1830,3755 1830,3860 1730,3860 1730,3635 1860,3635
NetL3_1 on Top Layer "NETL3_1_L01_P004" (solid, pour order 4): 1730,3530 1730,3620 1850,3620 1850,3565 1905,3510 1905,3490 1850,3490 1850,3530
M0_SNA on Top Layer "M0_SNA_L01_P002" (solid, pour order 2): 1730,3155 1840,3155 1910,3085 2280,3085 2345,3150 2345,3165 2350,3170 2415,3170 2415,3205 2160,3205 2120,3205 2110,3195 1965,3195 1955,3205 1955,3340 1945,3350 1730,3350
VCC on Bottom Layer "VCC_L04_P016" (solid, pour order 16): 2800,3620 2945,3620 3020,3695 3140,3695 3140,3850 2960,3850 2960,3795 2880,3795 2880,3745 2800,3745
M0_SH_A on Bottom Layer (solid, pour order 11): 2590,3620 2740,3620 2740,3565 2950,3565 2955,3560 3140,3560 3140,3680 3020,3680 2950,3610 2790,3610 2790,3805 2950,3805 2950,3850 2740,3850 2740,3790 2655,3790 2655,3745 2590,3745
VCC on Bottom Layer "VCC_L04_P015" (solid, pour order 15): 2800,3135 2875,3135 2875,3195 3130,3195 3140,3185 3140,2965 3135,2960 2960,2960 2960,3010 2800,3010
VCC on Bottom Layer "VCC_L04_P014" (solid, pour order 14): 2800,3440 2875,3440 2875,3495 2930,3495 2995,3430 2995,3405 2950,3360 2950,3320 2800,3320
M0_SH_C on Bottom Layer "M0_SH_C_L04_P013" (solid, pour order 13): 2590,3015 2590,3135 2655,3135 2655,3195 2740,3195 2740,3255 2960,3255 2970,3265 2970,3365 3015,3410 3140,3410 3140,3215 3130,3205 2790,3205 2790,3000 2950,3000 2950,2960 2740,2960 2740,3015
M0_SH_B on Bottom Layer "M0_SH_B_L04_P012" (solid, pour order 12): 2590,3320 2590,3440 2655,3440 2655,3490 2740,3490 2740,3545 3140,3545 3140,3425 3015,3425 2935,3505 2790,3505 2790,3310 2950,3310 2950,3265 2740,3265 2740,3320
M0_SPC on Bottom Layer "M0_SPC_L04_P008" (solid, pour order 8): 2730,2960 2480,2960 2480,3125 2485,3130 2535,3130 2535,3255 2730,3255 2730,3205 2580,3205 2580,3005 2730,3005
M0_SPB on Bottom Layer "M0_SPB_L04_P007" (solid, pour order 7): 2480,3545 2730,3545 2730,3500 2580,3500 2580,3310 2730,3310 2730,3265 2535,3265 2535,3395 2525,3405 2485,3405 2480,3410
M0_SPA on Bottom Layer "M0_SPA_L04_P006" (solid, pour order 6): 2480,3565 2730,3565 2730,3610 2580,3610 2580,3800 2730,3800 2730,3850 2545,3850 2530,3835 2530,3705 2480,3705

## Silkscreen, mask and mechanical layers (free items; w line width, h text height)
Mechanical 1:
  the board outline again, w10